# Altium PCB main.PcbDoc (part 8 of 16)
Units mil, origin at the board's own origin, x right, y up, seen from the top; angles counter-clockwise.
Board outline 8394.75 x 5164.44 mil, 7 copper layers (Top Layer 1, Layer 2, Layer 3, Unused, Layer 4_pow, Layer 5_gnd, Bottom 6+gnd), stack 64.043 mil thick; 364 components, 409 nets, 1932 pads, 1061 vias.
Unrouted connection lines stored in the file: 2.
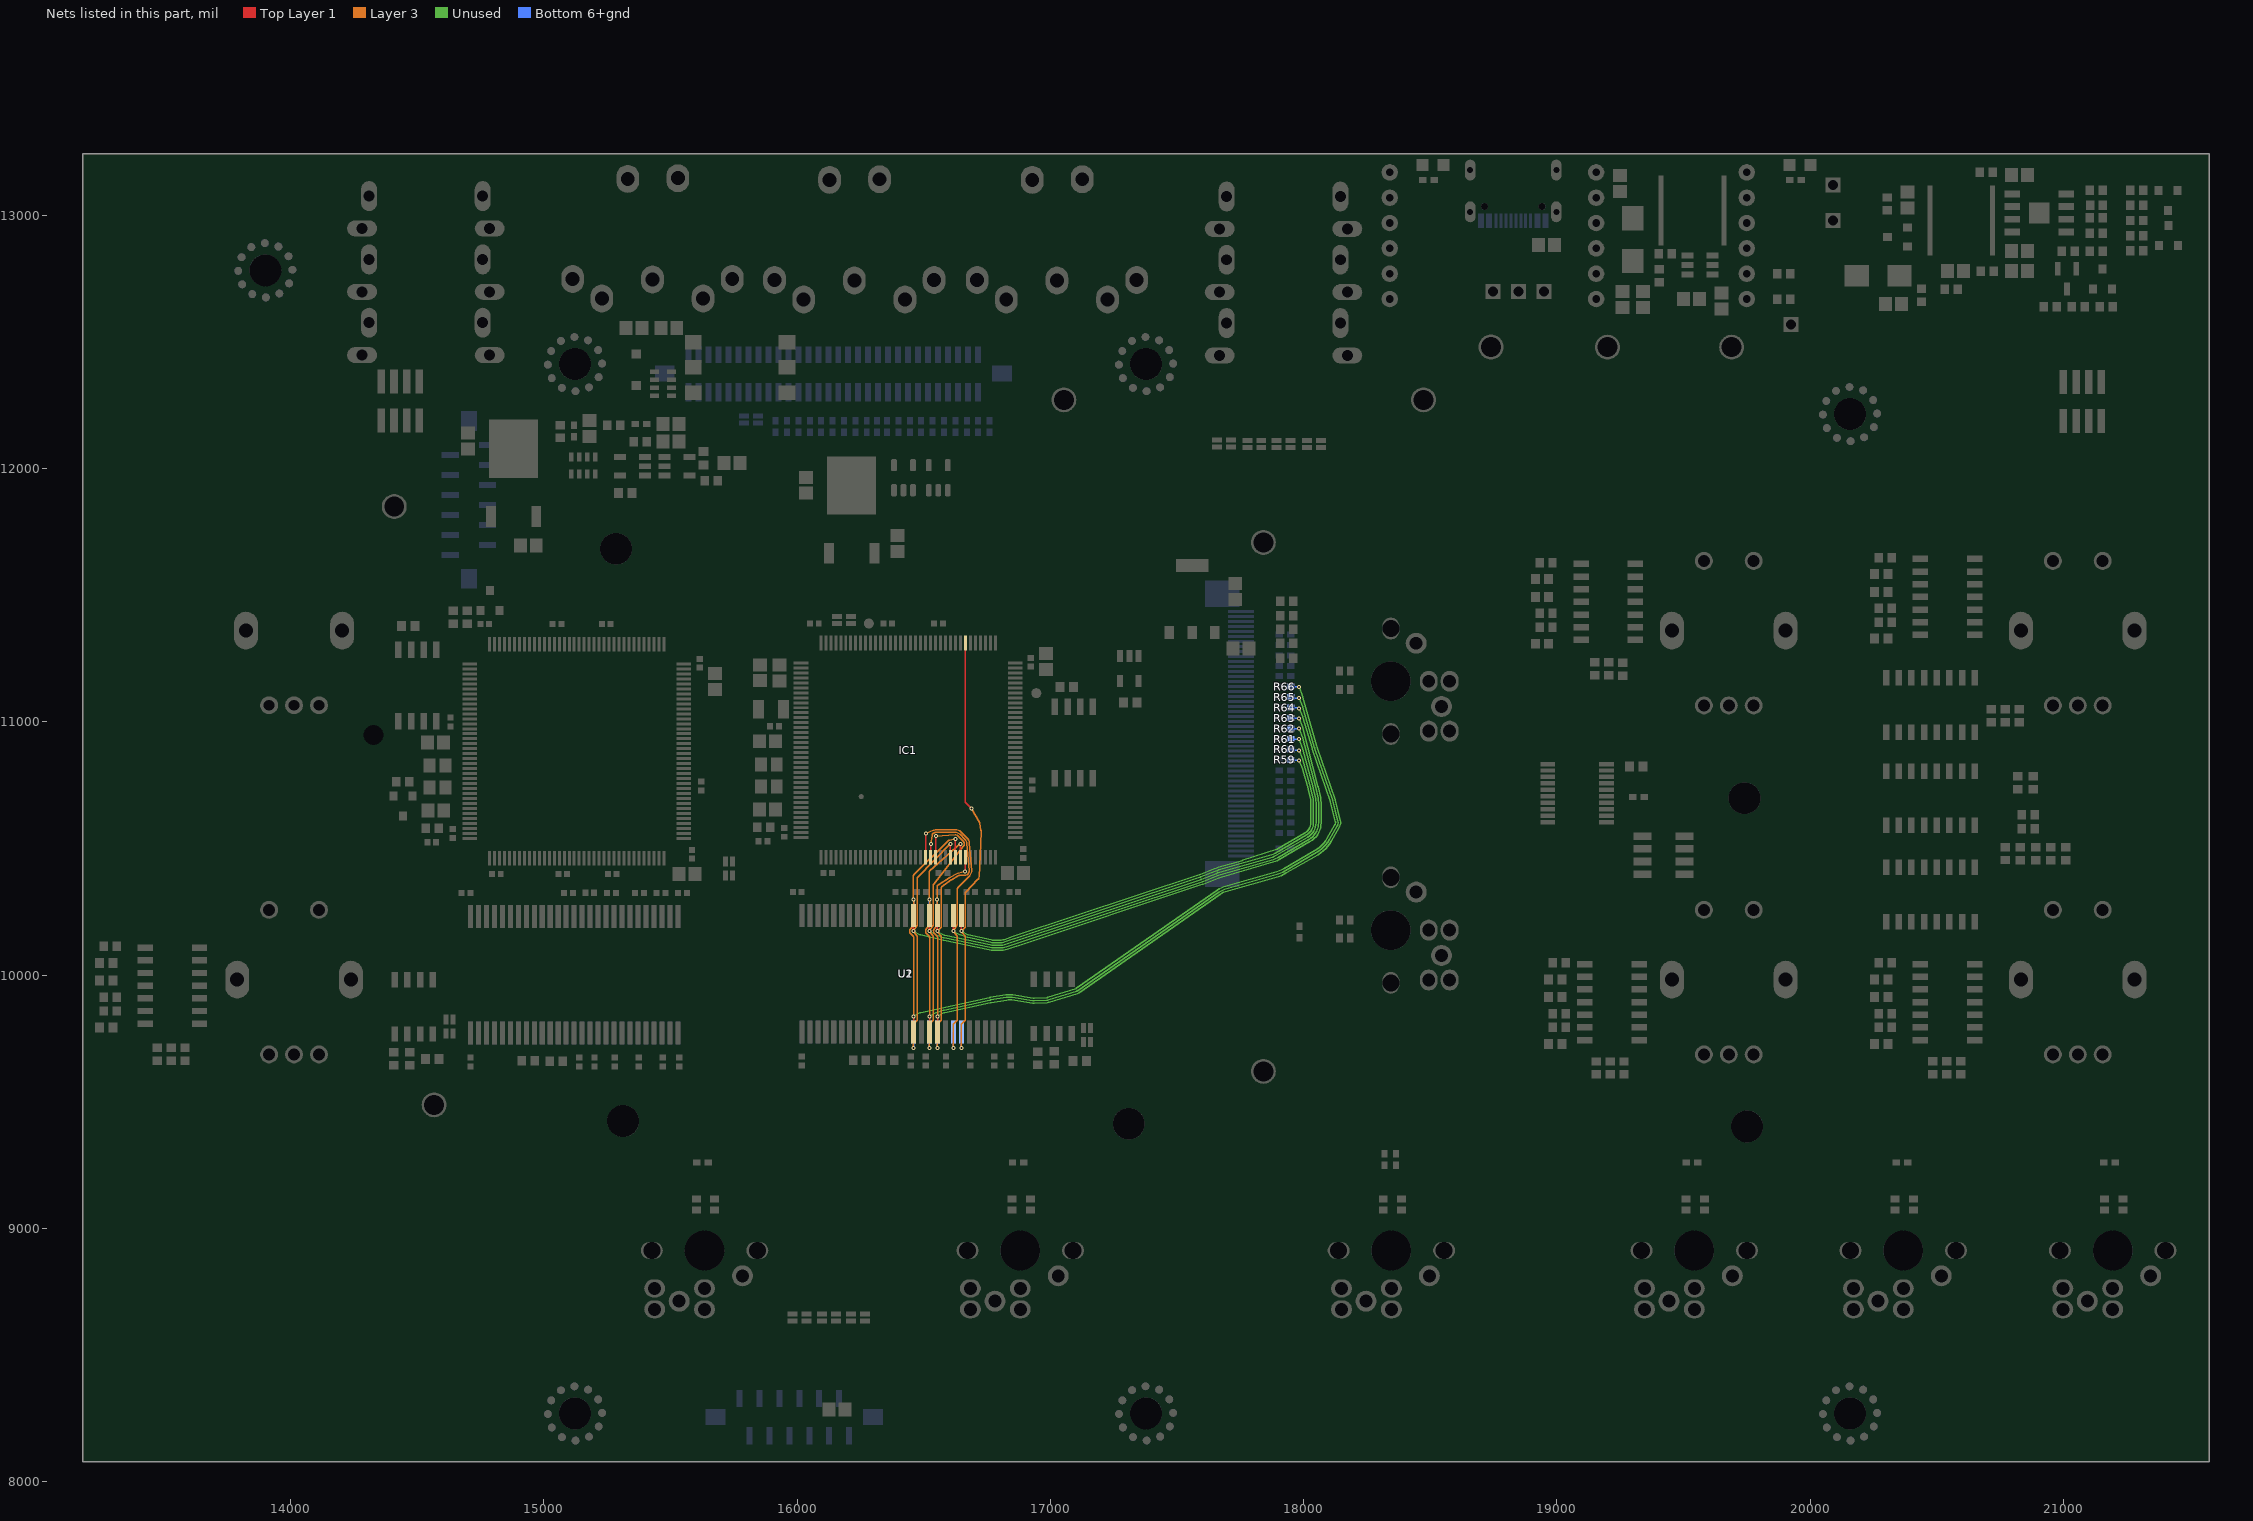
[diagram p11: the nets of this part, all layers, seen from the top]

## Via types
v1: diameter 15.75, hole 7.87, Top Layer 1 to Bottom 6+gnd, tented both sides, 961 vias
v2: diameter 27.56, hole 11.81, Top Layer 1 to Bottom 6+gnd, 45 vias
v3: diameter 23.62/23.62/23.62/23.62/23.62/23.62/23.62 (per signal layer), hole 12, Top Layer 1 to Bottom 6+gnd, tented top, 42 vias
v4: diameter 15.75, hole 7.87, Top Layer 1 to Bottom 6+gnd, 10 vias
v5: diameter 23.62/23.62/23.62/23.62/23.62/23.62/23.62 (per signal layer), hole 12, Top Layer 1 to Bottom 6+gnd, tented bottom, 3 vias

## Nets (pads, with @x,y where several pads share a name; then routed paths per layer and width w, separated by ;. In a path a pad name is that pad's centre, name@x,y a point inside that pad or via, vN(x,y) a via of type N, cw(c..) or ccw(c..) an arc to the next point about the centre after c; other vN are vias at no path point) (continued)
D3: IC1.115 R59.2 U1.7 U2.7 | length 3727
  Top Layer 1 w5: v1@16648.03,10176.1 16648.03,10193.72 U1.7@16648.38,10235.48 ; IC1.115@16664.69,11311.42 16664.69,10682.28 v1(16688.15,10658.82)
  Unused w5: v1(16648.38,10174.13) 16650.45,10172.06 ccw(c16653.95,10175.62) 16651.7,10171.16 16672.93,10160.42 ccw(c16679.87,10174.13) 16676.53,10159.13 16766.88,10139.56 ccw(c16774.36,10174.13) 16774.36,10138.76 16805.86,10138.76 ccw(c16805.86,10174.13) 16817.6,10140.76 16853.01,10153.09 cw(c16871.26,10100.81) 16853.84,10153.37 17587.34,10396.45 ccw(c17573.21,10439.17) 17589.84,10397.36 17647.76,10420.22 cw(c17710.04,10262.58) 17663.01,10425.42 17757.39,10452.73 ccw(c17749.02,10481.54) 17758.42,10453.05 17893.39,10497.7 ccw(c17882.4,10530.93) 17895.15,10498.34 17897.32,10499.19 ccw(c17895.5,10503.84) 17898,10499.51 18006.44,10562.8 ccw(c17983.57,10601.98) 18028.94,10601.98 18028.94,10681.98 ccw(c17983.57,10681.98) 18027.81,10692.07 18018.07,10734.8 ccw(c17983.57,10726.98) 18017.71,10736.25 17997.3,10811.48 ccw(c17982.46,10807.45) 17996.65,10813.36 v1(17982.46,10847.45)
  Layer 3 w5: v1(16648.38,9713.5) 16648.38,9805.11 cw(c16653.38,9805.11) 16649.83,9808.64 16663.04,9821.89 ; 16664,10324.67 16664,10191.78 cw(c16659,10191.87) 16662.54,10188.34 v1(16648.38,10174.13) v1@16648.38,10172.06 ; 16664,10324.68 cw(c16669,10324.68) 16665.42,10328.16 16714.15,10378.08 ccw(c16703.15,10388.82) 16718.5,10387.97 16725.59,10516.36 ; v1(16688.15,10658.82) 16721.2,10602.23 cw(c16716.88,10599.71) 16721.82,10600.5 ; 16721.82,10600.47 16726.09,10572.64 cw(c16710.89,10570.31) 16726.26,10570.13 ; 16726.26,10570.12 16725.61,10517.01 ; v1@16648.38,10172.06 ccw(c16653.38,10172.07) v1@16649.62,10168.77 ; v1@16648.38,10172.06 ccw(c16653.38,10172.07) v1@16649.62,10168.77 ; v1@16648.38,10172.06 ccw(c16653.38,10172.07) v1@16649.62,10168.77 ; v1@16648.38,10172.06 ccw(c16653.38,10172.07) v1@16649.62,10168.77 ; v1@16648.38,10172.06 ccw(c16653.38,10172.07) v1@16649.62,10168.77 ; v1@16648.38,10172.06 ccw(c16653.38,10172.07) v1@16649.62,10168.77 ; v1@16648.38,10172.06 ccw(c16653.38,10172.07) v1@16649.62,10168.77 ; v1@16648.38,10172.06 ccw(c16653.38,10172.07) v1@16649.62,10168.77 ; v1@16648.38,10172.06 ccw(c16653.38,10172.07) v1@16649.62,10168.77 ; v1@16648.38,10172.06 ccw(c16653.38,10172.07) v1@16649.62,10168.77 ; v1@16648.38,10172.06 ccw(c16653.38,10172.07) v1@16649.62,10168.77 ; v1@16648.38,10172.06 ccw(c16653.38,10172.07) v1@16649.62,10168.77 ; v1@16648.38,10172.06 ccw(c16653.38,10172.07) v1@16649.62,10168.77 ; v1@16648.38,10172.06 ccw(c16653.38,10172.07) v1@16649.62,10168.77 ; v1@16648.38,10172.06 ccw(c16653.38,10172.07) v1@16649.62,10168.77 ; v1@16648.38,10172.06 ccw(c16653.38,10172.07) v1@16649.62,10168.77 ; v1@16649.62,10168.77 16663.26,10153.23 ; 16663.04,9821.89 ccw(c16659.5,9825.42) 16664.5,9825.33 ; 16663.04,9821.89 ccw(c16659.5,9825.42) 16664.5,9825.33 ; 16663.04,9821.89 ccw(c16659.5,9825.42) 16664.5,9825.33 ; 16663.04,9821.89 ccw(c16659.5,9825.42) 16664.5,9825.33 ; 16663.04,9821.89 ccw(c16659.5,9825.42) 16664.5,9825.33 ; 16663.04,9821.89 ccw(c16659.5,9825.42) 16664.5,9825.33 ; 16663.04,9821.89 ccw(c16659.5,9825.42) 16664.5,9825.33 ; 16663.04,9821.89 ccw(c16659.5,9825.42) 16664.5,9825.33 ; 16663.04,9821.89 ccw(c16659.5,9825.42) 16664.5,9825.33 ; 16663.04,9821.89 ccw(c16659.5,9825.42) 16664.5,9825.33 ; 16663.04,9821.89 ccw(c16659.5,9825.42) 16664.5,9825.33 ; 16663.04,9821.89 ccw(c16659.5,9825.42) 16664.5,9825.33 ; 16663.04,9821.89 ccw(c16659.5,9825.42) 16664.5,9825.33 ; 16663.04,9821.89 ccw(c16659.5,9825.42) 16664.5,9825.33 ; 16663.04,9821.89 ccw(c16659.5,9825.42) 16664.5,9825.33 ; 16663.04,9821.89 ccw(c16659.5,9825.42) 16664.5,9825.33 ; 16663.26,10153.23 cw(c16659.5,10149.93) 16664.5,10150.02 ; 16663.26,10153.23 cw(c16659.5,10149.93) 16664.5,10150.02 ; 16663.26,10153.23 cw(c16659.5,10149.93) 16664.5,10150.02 ; 16663.26,10153.23 cw(c16659.5,10149.93) 16664.5,10150.02 ; 16663.26,10153.23 cw(c16659.5,10149.93) 16664.5,10150.02 ; 16663.26,10153.23 cw(c16659.5,10149.93) 16664.5,10150.02 ; 16663.26,10153.23 cw(c16659.5,10149.93) 16664.5,10150.02 ; 16663.26,10153.23 cw(c16659.5,10149.93) 16664.5,10150.02 ; 16663.26,10153.23 cw(c16659.5,10149.93) 16664.5,10150.02 ; 16663.26,10153.23 cw(c16659.5,10149.93) 16664.5,10150.02 ; 16663.26,10153.23 cw(c16659.5,10149.93) 16664.5,10150.02 ; 16663.26,10153.23 cw(c16659.5,10149.93) 16664.5,10150.02 ; 16663.26,10153.23 cw(c16659.5,10149.93) 16664.5,10150.02 ; 16663.26,10153.23 cw(c16659.5,10149.93) 16664.5,10150.02 ; 16663.26,10153.23 cw(c16659.5,10149.93) 16664.5,10150.02 ; 16663.26,10153.23 cw(c16659.5,10149.93) 16664.5,10150.02 ; 16664.5,9825.33 16664.5,10150.02 ; 16725.59,10516.36 ccw(c16710.24,10517.2) 16725.61,10517.01 ; 16725.59,10516.36 ccw(c16710.24,10517.2) 16725.61,10517.01 ; 16725.59,10516.36 ccw(c16710.24,10517.2) 16725.61,10517.01 ; 16725.59,10516.36 ccw(c16710.24,10517.2) 16725.61,10517.01 ; 16725.59,10516.36 ccw(c16710.24,10517.2) 16725.61,10517.01 ; 16725.59,10516.36 ccw(c16710.24,10517.2) 16725.61,10517.01 ; 16725.59,10516.36 ccw(c16710.24,10517.2) 16725.61,10517.01 ; 16725.59,10516.36 ccw(c16710.24,10517.2) 16725.61,10517.01 ; 16725.59,10516.36 ccw(c16710.24,10517.2) 16725.61,10517.01 ; 16725.59,10516.36 ccw(c16710.24,10517.2) 16725.61,10517.01 ; 16725.59,10516.36 ccw(c16710.24,10517.2) 16725.61,10517.01 ; 16725.59,10516.36 ccw(c16710.24,10517.2) 16725.61,10517.01 ; 16725.59,10516.36 ccw(c16710.24,10517.2) 16725.61,10517.01 ; 16725.59,10516.36 ccw(c16710.24,10517.2) 16725.61,10517.01 ; 16725.59,10516.36 ccw(c16710.24,10517.2) 16725.61,10517.01 ; 16725.59,10516.36 ccw(c16710.24,10517.2) 16725.61,10517.01
  Bottom 6+gnd w5: v1@16648.62,9713.75 U2.7@16648.62,9775.59 ; R59.2@17947.32,10848.97 17948.43,10848.97 17980.94,10848.97 v1(17982.46,10847.45)
D4: IC1.58 R60.2 U1.8 U2.8 | length 4529.1
  Top Layer 1 w5: IC1.58@16507.21,10465.91 16507.6,10466.3 16507.6,10558.27 v1(16509.02,10559.69) ; v1@16616.54,10177.2 16616.54,10193.72 U1.8@16616.88,10235.48
  Unused w5: v1(17982.46,10887.45) 17996.65,10853.36 cw(c17982.46,10847.45) 17997.31,10851.42 18027.41,10738.69 cw(c17983.57,10726.98) 18027.82,10737 18037.56,10694.29 cw(c17983.57,10681.98) 18038.94,10681.98 18038.94,10601.98 cw(c17983.57,10601.98) 18011.48,10554.16 17887.12,10481.59 cw(c17859.4,10529.09) 17874.35,10476.16 17665.74,10415.8 ccw(c17710.04,10262.58) 17651.45,10410.93 17593.5,10388.05 cw(c17573.21,10439.17) 17590.48,10386.96 16857.02,10143.89 ccw(c16871.26,10100.81) 16856.28,10143.64 16820.87,10131.31 cw(c16805.86,10174.13) 16805.86,10128.76 16774.36,10128.76 cw(c16774.36,10174.13) 16764.76,10129.79 16674.41,10149.35 cw(c16679.87,10174.13) 16671.89,10150.05 16643.49,10159.55 cw(c16648.38,10174.13) 16641.26,10160.51 16619.43,10171.91 cw(c16621.74,10176.34) 16618.25,10172.76 v1(16616.88,10174.13) ; v1(16616.88,10174.13) ccw(c16611.9,10174.58) 16616.54,10176.44 16616.54,10177.2 ccw(c16621.54,10177.23) 16616.71,10175.96 16616.74,10175.85 cw(c16611.9,10174.58) 16616.89,10174.28 v1(16616.88,10174.13)
  Layer 3 w5: v1(16509.02,10559.69) 16538.18,10572.15 ; v1(16616.88,9713.5) 16616.88,9805.11 cw(c16621.88,9805.12) 16618.33,9808.63 16631.54,9821.89 ; 16679.86,10521.47 16688.8,10412.59 ; 16538.18,10572.15 cw(c16548.15,10548.82) 16548.23,10574.19 ; 16538.18,10572.15 cw(c16548.15,10548.82) 16548.23,10574.19 ; 16538.18,10572.15 cw(c16548.15,10548.82) 16548.23,10574.19 ; 16538.18,10572.15 cw(c16548.15,10548.82) 16548.23,10574.19 ; 16538.18,10572.15 cw(c16548.15,10548.82) 16548.23,10574.19 ; 16538.18,10572.15 cw(c16548.15,10548.82) 16548.23,10574.19 ; 16538.18,10572.15 cw(c16548.15,10548.82) 16548.23,10574.19 ; 16538.18,10572.15 cw(c16548.15,10548.82) 16548.23,10574.19 ; 16548.23,10574.19 16625.32,10573.96 ; 16625.32,10573.96 cw(c16625.24,10538.58) 16650.66,10563.18 ; 16625.32,10573.96 cw(c16625.24,10538.58) 16650.66,10563.18 ; 16625.32,10573.96 cw(c16625.24,10538.58) 16650.66,10563.18 ; 16625.32,10573.96 cw(c16625.24,10538.58) 16650.66,10563.18 ; 16625.32,10573.96 cw(c16625.24,10538.58) 16650.66,10563.18 ; 16625.32,10573.96 cw(c16625.24,10538.58) 16650.66,10563.18 ; 16625.32,10573.96 cw(c16625.24,10538.58) 16650.66,10563.18 ; 16625.32,10573.96 cw(c16625.24,10538.58) 16650.66,10563.18 ; 16625.32,10573.96 cw(c16625.24,10538.58) 16650.66,10563.18 ; 16625.32,10573.96 cw(c16625.24,10538.58) 16650.66,10563.18 ; 16625.32,10573.96 cw(c16625.24,10538.58) 16650.66,10563.18 ; 16625.32,10573.96 cw(c16625.24,10538.58) 16650.66,10563.18 ; 16625.32,10573.96 cw(c16625.24,10538.58) 16650.66,10563.18 ; 16625.32,10573.96 cw(c16625.24,10538.58) 16650.66,10563.18 ; 16625.32,10573.96 cw(c16625.24,10538.58) 16650.66,10563.18 ; 16625.32,10573.96 cw(c16625.24,10538.58) 16650.66,10563.18 ; 16631.54,9821.89 ccw(c16628,9825.42) 16633,9825.33 ; 16631.54,9821.89 ccw(c16628,9825.42) 16633,9825.33 ; 16631.54,9821.89 ccw(c16628,9825.42) 16633,9825.33 ; 16631.54,9821.89 ccw(c16628,9825.42) 16633,9825.33 ; 16631.54,9821.89 ccw(c16628,9825.42) 16633,9825.33 ; 16631.54,9821.89 ccw(c16628,9825.42) 16633,9825.33 ; 16631.54,9821.89 ccw(c16628,9825.42) 16633,9825.33 ; 16631.54,9821.89 ccw(c16628,9825.42) 16633,9825.33 ; 16631.54,9821.89 ccw(c16628,9825.42) 16633,9825.33 ; 16631.54,9821.89 ccw(c16628,9825.42) 16633,9825.33 ; 16631.54,9821.89 ccw(c16628,9825.42) 16633,9825.33 ; 16631.54,9821.89 ccw(c16628,9825.42) 16633,9825.33 ; 16631.54,9821.89 ccw(c16628,9825.42) 16633,9825.33 ; 16631.54,9821.89 ccw(c16628,9825.42) 16633,9825.33 ; 16631.54,9821.89 ccw(c16628,9825.42) 16633,9825.33 ; 16631.54,9821.89 ccw(c16628,9825.42) 16633,9825.33 ; 16631.95,10152.99 cw(c16628,10149.93) 16633,10150.02 ; 16631.95,10152.99 cw(c16628,10149.93) 16633,10150.02 ; 16631.95,10152.99 cw(c16628,10149.93) 16633,10150.02 ; 16631.95,10152.99 cw(c16628,10149.93) 16633,10150.02 ; 16631.95,10152.99 cw(c16628,10149.93) 16633,10150.02 ; 16631.95,10152.99 cw(c16628,10149.93) 16633,10150.02 ; 16631.95,10152.99 cw(c16628,10149.93) 16633,10150.02 ; 16631.95,10152.99 cw(c16628,10149.93) 16633,10150.02 ; 16631.95,10152.99 cw(c16628,10149.93) 16633,10150.02 ; 16631.95,10152.99 cw(c16628,10149.93) 16633,10150.02 ; 16631.95,10152.99 cw(c16628,10149.93) 16633,10150.02 ; 16631.95,10152.99 cw(c16628,10149.93) 16633,10150.02 ; 16631.95,10152.99 cw(c16628,10149.93) 16633,10150.02 ; 16631.95,10152.99 cw(c16628,10149.93) 16633,10150.02 ; 16631.95,10152.99 cw(c16628,10149.93) 16633,10150.02 ; 16631.95,10152.99 cw(c16628,10149.93) 16633,10150.02 ; 16631.95,10152.99 16617.94,10171.06 cw(c16621.88,10174.13) v1(16616.88,10174.13) 16616.88,10174.19 cw(c16621.88,10174.13) 16617.68,10176.85 16632.45,10199.68 ; 16632.45,10199.68 ccw(c16628.25,10202.4) 16633.25,10202.31 ; 16632.45,10199.68 ccw(c16628.25,10202.4) 16633.25,10202.31 ; 16632.45,10199.68 ccw(c16628.25,10202.4) 16633.25,10202.31 ; 16632.45,10199.68 ccw(c16628.25,10202.4) 16633.25,10202.31 ; 16632.45,10199.68 ccw(c16628.25,10202.4) 16633.25,10202.31 ; 16632.45,10199.68 ccw(c16628.25,10202.4) 16633.25,10202.31 ; 16632.45,10199.68 ccw(c16628.25,10202.4) 16633.25,10202.31 ; 16632.45,10199.68 ccw(c16628.25,10202.4) 16633.25,10202.31 ; 16632.45,10199.68 ccw(c16628.25,10202.4) 16633.25,10202.31 ; 16632.45,10199.68 ccw(c16628.25,10202.4) 16633.25,10202.31 ; 16632.45,10199.68 ccw(c16628.25,10202.4) 16633.25,10202.31 ; 16632.45,10199.68 ccw(c16628.25,10202.4) 16633.25,10202.31 ; 16632.45,10199.68 ccw(c16628.25,10202.4) 16633.25,10202.31 ; 16632.45,10199.68 ccw(c16628.25,10202.4) 16633.25,10202.31 ; 16632.45,10199.68 ccw(c16628.25,10202.4) 16633.25,10202.31 ; 16632.45,10199.68 ccw(c16628.25,10202.4) 16633.25,10202.31 ; 16633,9825.33 16633,10150.02 ; 16633.25,10202.31 16633.25,10341.5 ; 16633.25,10341.5 cw(c16638.25,10341.5) 16634.7,10345.01 ; 16633.25,10341.5 cw(c16638.25,10341.5) 16634.7,10345.01 ; 16633.25,10341.5 cw(c16638.25,10341.5) 16634.7,10345.01 ; 16633.25,10341.5 cw(c16638.25,10341.5) 16634.7,10345.01 ; 16633.25,10341.5 cw(c16638.25,10341.5) 16634.7,10345.01 ; 16633.25,10341.5 cw(c16638.25,10341.5) 16634.7,10345.01 ; 16633.25,10341.5 cw(c16638.25,10341.5) 16634.7,10345.01 ; 16633.25,10341.5 cw(c16638.25,10341.5) 16634.7,10345.01 ; 16633.25,10341.5 cw(c16638.25,10341.5) 16634.7,10345.01 ; 16633.25,10341.5 cw(c16638.25,10341.5) 16634.7,10345.01 ; 16633.25,10341.5 cw(c16638.25,10341.5) 16634.7,10345.01 ; 16633.25,10341.5 cw(c16638.25,10341.5) 16634.7,10345.01 ; 16633.25,10341.5 cw(c16638.25,10341.5) 16634.7,10345.01 ; 16633.25,10341.5 cw(c16638.25,10341.5) 16634.7,10345.01 ; 16633.25,10341.5 cw(c16638.25,10341.5) 16634.7,10345.01 ; 16633.25,10341.5 cw(c16638.25,10341.5) 16634.7,10345.01 ; 16634.7,10345.01 16636.28,10346.59 ; 16636.28,10346.59 ccw(c16618.3,10364.5) 16636.41,10346.72 ; 16636.28,10346.59 ccw(c16618.3,10364.5) 16636.41,10346.72 ; 16636.28,10346.59 ccw(c16618.3,10364.5) 16636.41,10346.72 ; 16636.28,10346.59 ccw(c16618.3,10364.5) 16636.41,10346.72 ; 16636.28,10346.59 ccw(c16618.3,10364.5) 16636.41,10346.72 ; 16636.28,10346.59 ccw(c16618.3,10364.5) 16636.41,10346.72 ; 16636.28,10346.59 ccw(c16618.3,10364.5) 16636.41,10346.72 ; 16636.28,10346.59 ccw(c16618.3,10364.5) 16636.41,10346.72 ; 16636.28,10346.59 ccw(c16618.3,10364.5) 16636.41,10346.72 ; 16636.28,10346.59 ccw(c16618.3,10364.5) 16636.41,10346.72 ; 16636.28,10346.59 ccw(c16618.3,10364.5) 16636.41,10346.72 ; 16636.28,10346.59 ccw(c16618.3,10364.5) 16636.41,10346.72 ; 16636.28,10346.59 ccw(c16618.3,10364.5) 16636.41,10346.72 ; 16636.28,10346.59 ccw(c16618.3,10364.5) 16636.41,10346.72 ; 16636.28,10346.59 ccw(c16618.3,10364.5) 16636.41,10346.72 ; 16636.28,10346.59 ccw(c16618.3,10364.5) 16636.41,10346.72 ; 16636.41,10346.72 16681.61,10392.74 ; 16650.66,10563.18 16669.98,10543.23 ; 16669.98,10543.23 cw(c16644.61,10518.58) 16679.86,10521.48 ; 16669.98,10543.23 cw(c16644.61,10518.58) 16679.86,10521.48 ; 16669.98,10543.23 cw(c16644.61,10518.58) 16679.86,10521.48 ; 16669.98,10543.23 cw(c16644.61,10518.58) 16679.86,10521.48 ; 16669.98,10543.23 cw(c16644.61,10518.58) 16679.86,10521.48 ; 16669.98,10543.23 cw(c16644.61,10518.58) 16679.86,10521.48 ; 16669.98,10543.23 cw(c16644.61,10518.58) 16679.86,10521.48 ; 16669.98,10543.23 cw(c16644.61,10518.58) 16679.86,10521.48 ; 16669.98,10543.23 cw(c16644.61,10518.58) 16679.86,10521.48 ; 16669.98,10543.23 cw(c16644.61,10518.58) 16679.86,10521.48 ; 16669.98,10543.23 cw(c16644.61,10518.58) 16679.86,10521.48 ; 16669.98,10543.23 cw(c16644.61,10518.58) 16679.86,10521.48 ; 16669.98,10543.23 cw(c16644.61,10518.58) 16679.86,10521.48 ; 16669.98,10543.23 cw(c16644.61,10518.58) 16679.86,10521.48 ; 16669.98,10543.23 cw(c16644.61,10518.58) 16679.86,10521.48 ; 16669.98,10543.23 cw(c16644.61,10518.58) 16679.86,10521.48 ; 16681.61,10392.74 ccw(c16663.51,10410.52) 16688.8,10412.59 ; 16681.61,10392.74 ccw(c16663.51,10410.52) 16688.8,10412.59 ; 16681.61,10392.74 ccw(c16663.51,10410.52) 16688.8,10412.59 ; 16681.61,10392.74 ccw(c16663.51,10410.52) 16688.8,10412.59 ; 16681.61,10392.74 ccw(c16663.51,10410.52) 16688.8,10412.59 ; 16681.61,10392.74 ccw(c16663.51,10410.52) 16688.8,10412.59 ; 16681.61,10392.74 ccw(c16663.51,10410.52) 16688.8,10412.59 ; 16681.61,10392.74 ccw(c16663.51,10410.52) 16688.8,10412.59 ; 16681.61,10392.74 ccw(c16663.51,10410.52) 16688.8,10412.59 ; 16681.61,10392.74 ccw(c16663.51,10410.52) 16688.8,10412.59 ; 16681.61,10392.74 ccw(c16663.51,10410.52) 16688.8,10412.59 ; 16681.61,10392.74 ccw(c16663.51,10410.52) 16688.8,10412.59 ; 16681.61,10392.74 ccw(c16663.51,10410.52) 16688.8,10412.59 ; 16681.61,10392.74 ccw(c16663.51,10410.52) 16688.8,10412.59 ; 16681.61,10392.74 ccw(c16663.51,10410.52) 16688.8,10412.59 ; 16681.61,10392.74 ccw(c16663.51,10410.52) 16688.8,10412.59
  Bottom 6+gnd w5: v1@16617.13,9713.75 U2.8@16617.13,9775.59 ; R60.2@17947.32,10890.29 17948.15,10890.11 17960.69,10887.45 v1(17982.46,10887.45)
D5: IC1.59 R61.2 U1.10 U2.10 | length 4236.6
  Top Layer 1 w5: IC1.59@16526.73,10466.06 16527.3,10466.63 16527.3,10518.01 v1(16527.87,10518.58) ; v1(16553.89,10174.13) 16553.89,10193.72 U1.10@16554.13,10236.22
  Unused w5: v1(16553.89,10174.13) 16555.43,10172.64 ccw(c16558.89,10176.25) 16556.29,10171.98 16577.74,10158.97 ccw(c16585.65,10172.15) 16582.55,10157.09 16763.14,10119.91 ccw(c16774.36,10174.13) 16774.36,10118.76 16805.86,10118.76 ccw(c16805.86,10174.13) 16824.13,10121.86 16859.61,10134.21 cw(c16871.26,10100.81) 16860.13,10134.39 17593.62,10377.46 ccw(c17573.21,10439.17) 17597.15,10378.74 17655.15,10401.64 cw(c17710.04,10262.58) 17668.53,10406.2 17877.13,10466.55 ccw(c17859.4,10529.09) 17892.16,10472.95 18016.52,10545.52 ccw(c17983.57,10601.98) 18048.94,10601.98 18048.94,10681.98 ccw(c17983.57,10681.98) 18047.31,10696.49 18037.57,10739.21 ccw(c17983.57,10726.98) 18037.1,10741.16 17997.32,10891.39 ccw(c17982.46,10887.45) 17996.91,10892.71 v1(17982.46,10932.45)
  Layer 3 w5: v1(16527.87,10518.58) 16532.96,10551.19 cw(c16548.15,10548.82) 16548.2,10564.19 16625.31,10563.96 ; v1(16553.89,9713.5) 16553.89,9805.11 cw(c16558.89,9805.12) 16555.33,9808.63 16568.55,9821.89 ; v1@16553.89,10172.06 ccw(c16558.89,10172.07) v1@16555.13,10168.77 ; v1@16553.89,10172.06 ccw(c16558.89,10172.07) v1@16555.13,10168.77 ; v1@16553.89,10172.06 ccw(c16558.89,10172.07) v1@16555.13,10168.77 ; v1@16553.89,10172.06 ccw(c16558.89,10172.07) v1@16555.13,10168.77 ; v1@16553.89,10172.06 ccw(c16558.89,10172.07) v1@16555.13,10168.77 ; v1@16553.89,10172.06 ccw(c16558.89,10172.07) v1@16555.13,10168.77 ; v1@16553.89,10172.06 ccw(c16558.89,10172.07) v1@16555.13,10168.77 ; v1@16553.89,10172.06 ccw(c16558.89,10172.07) v1@16555.13,10168.77 ; v1@16553.89,10172.06 ccw(c16558.89,10172.07) v1@16555.13,10168.77 ; v1@16553.89,10172.06 ccw(c16558.89,10172.07) v1@16555.13,10168.77 ; v1@16553.89,10172.06 ccw(c16558.89,10172.07) v1@16555.13,10168.77 ; v1@16553.89,10172.06 ccw(c16558.89,10172.07) v1@16555.13,10168.77 ; v1@16553.89,10172.06 ccw(c16558.89,10172.07) v1@16555.13,10168.77 ; v1@16553.89,10172.06 ccw(c16558.89,10172.07) v1@16555.13,10168.77 ; v1@16553.89,10172.06 ccw(c16558.89,10172.07) v1@16555.13,10168.77 ; v1@16553.89,10172.06 ccw(c16558.89,10172.07) v1@16555.13,10168.77 ; v1@16553.89,10172.06 v1(16553.89,10174.13) 16568.14,10188.43 ccw(c16564.6,10191.96) 16569.6,10191.87 16569.6,10344.72 cw(c16574.6,10344.72) 16571.6,10348.72 16609.09,10376.81 ; v1@16555.13,10168.77 16568.77,10153.23 ; 16568.55,9821.89 ccw(c16565.01,9825.42) 16570.01,9825.33 ; 16568.55,9821.89 ccw(c16565.01,9825.42) 16570.01,9825.33 ; 16568.55,9821.89 ccw(c16565.01,9825.42) 16570.01,9825.33 ; 16568.55,9821.89 ccw(c16565.01,9825.42) 16570.01,9825.33 ; 16568.55,9821.89 ccw(c16565.01,9825.42) 16570.01,9825.33 ; 16568.55,9821.89 ccw(c16565.01,9825.42) 16570.01,9825.33 ; 16568.55,9821.89 ccw(c16565.01,9825.42) 16570.01,9825.33 ; 16568.55,9821.89 ccw(c16565.01,9825.42) 16570.01,9825.33 ; 16568.55,9821.89 ccw(c16565.01,9825.42) 16570.01,9825.33 ; 16568.55,9821.89 ccw(c16565.01,9825.42) 16570.01,9825.33 ; 16568.55,9821.89 ccw(c16565.01,9825.42) 16570.01,9825.33 ; 16568.55,9821.89 ccw(c16565.01,9825.42) 16570.01,9825.33 ; 16568.55,9821.89 ccw(c16565.01,9825.42) 16570.01,9825.33 ; 16568.55,9821.89 ccw(c16565.01,9825.42) 16570.01,9825.33 ; 16568.55,9821.89 ccw(c16565.01,9825.42) 16570.01,9825.33 ; 16568.55,9821.89 ccw(c16565.01,9825.42) 16570.01,9825.33 ; 16568.77,10153.23 cw(c16565.01,10149.93) 16570.01,10150.02 ; 16568.77,10153.23 cw(c16565.01,10149.93) 16570.01,10150.02 ; 16568.77,10153.23 cw(c16565.01,10149.93) 16570.01,10150.02 ; 16568.77,10153.23 cw(c16565.01,10149.93) 16570.01,10150.02 ; 16568.77,10153.23 cw(c16565.01,10149.93) 16570.01,10150.02 ; 16568.77,10153.23 cw(c16565.01,10149.93) 16570.01,10150.02 ; 16568.77,10153.23 cw(c16565.01,10149.93) 16570.01,10150.02 ; 16568.77,10153.23 cw(c16565.01,10149.93) 16570.01,10150.02 ; 16568.77,10153.23 cw(c16565.01,10149.93) 16570.01,10150.02 ; 16568.77,10153.23 cw(c16565.01,10149.93) 16570.01,10150.02 ; 16568.77,10153.23 cw(c16565.01,10149.93) 16570.01,10150.02 ; 16568.77,10153.23 cw(c16565.01,10149.93) 16570.01,10150.02 ; 16568.77,10153.23 cw(c16565.01,10149.93) 16570.01,10150.02 ; 16568.77,10153.23 cw(c16565.01,10149.93) 16570.01,10150.02 ; 16568.77,10153.23 cw(c16565.01,10149.93) 16570.01,10150.02 ; 16568.77,10153.23 cw(c16565.01,10149.93) 16570.01,10150.02 ; 16570.01,9825.33 16570.01,10150.02 ; 16609.09,10376.81 cw(c16618.3,10364.5) 16610.63,10377.83 ; 16609.09,10376.81 cw(c16618.3,10364.5) 16610.63,10377.83 ; 16609.09,10376.81 cw(c16618.3,10364.5) 16610.63,10377.83 ; 16609.09,10376.81 cw(c16618.3,10364.5) 16610.63,10377.83 ; 16609.09,10376.81 cw(c16618.3,10364.5) 16610.63,10377.83 ; 16609.09,10376.81 cw(c16618.3,10364.5) 16610.63,10377.83 ; 16609.09,10376.81 cw(c16618.3,10364.5) 16610.63,10377.83 ; 16609.09,10376.81 cw(c16618.3,10364.5) 16610.63,10377.83 ; 16609.09,10376.81 cw(c16618.3,10364.5) 16610.63,10377.83 ; 16609.09,10376.81 cw(c16618.3,10364.5) 16610.63,10377.83 ; 16609.09,10376.81 cw(c16618.3,10364.5) 16610.63,10377.83 ; 16609.09,10376.81 cw(c16618.3,10364.5) 16610.63,10377.83 ; 16609.09,10376.81 cw(c16618.3,10364.5) 16610.63,10377.83 ; 16609.09,10376.81 cw(c16618.3,10364.5) 16610.63,10377.83 ; 16609.09,10376.81 cw(c16618.3,10364.5) 16610.63,10377.83 ; 16609.09,10376.81 cw(c16618.3,10364.5) 16610.63,10377.83 ; 16610.63,10377.83 16635.48,10392.14 ; 16625.31,10563.96 cw(c16625.24,10538.58) 16643.47,10556.23 ; 16625.31,10563.96 cw(c16625.24,10538.58) 16643.47,10556.23 ; 16625.31,10563.96 cw(c16625.24,10538.58) 16643.47,10556.23 ; 16625.31,10563.96 cw(c16625.24,10538.58) 16643.47,10556.23 ; 16625.31,10563.96 cw(c16625.24,10538.58) 16643.47,10556.23 ; 16625.31,10563.96 cw(c16625.24,10538.58) 16643.47,10556.23 ; 16625.31,10563.96 cw(c16625.24,10538.58) 16643.47,10556.23 ; 16625.31,10563.96 cw(c16625.24,10538.58) 16643.47,10556.23 ; 16625.31,10563.96 cw(c16625.24,10538.58) 16643.47,10556.23 ; 16625.31,10563.96 cw(c16625.24,10538.58) 16643.47,10556.23 ; 16625.31,10563.96 cw(c16625.24,10538.58) 16643.47,10556.23 ; 16625.31,10563.96 cw(c16625.24,10538.58) 16643.47,10556.23 ; 16625.31,10563.96 cw(c16625.24,10538.58) 16643.47,10556.23 ; 16625.31,10563.96 cw(c16625.24,10538.58) 16643.47,10556.23 ; 16625.31,10563.96 cw(c16625.24,10538.58) 16643.47,10556.23 ; 16625.31,10563.96 cw(c16625.24,10538.58) 16643.47,10556.23 ; 16635.48,10392.14 cw(c16643.15,10378.82) 16642.45,10394.18 ; 16635.48,10392.14 cw(c16643.15,10378.82) 16642.45,10394.18 ; 16635.48,10392.14 cw(c16643.15,10378.82) 16642.45,10394.18 ; 16635.48,10392.14 cw(c16643.15,10378.82) 16642.45,10394.18 ; 16635.48,10392.14 cw(c16643.15,10378.82) 16642.45,10394.18 ; 16635.48,10392.14 cw(c16643.15,10378.82) 16642.45,10394.18 ; 16635.48,10392.14 cw(c16643.15,10378.82) 16642.45,10394.18 ; 16635.48,10392.14 cw(c16643.15,10378.82) 16642.45,10394.18 ; 16635.48,10392.14 cw(c16643.15,10378.82) 16642.45,10394.18 ; 16635.48,10392.14 cw(c16643.15,10378.82) 16642.45,10394.18 ; 16635.48,10392.14 cw(c16643.15,10378.82) 16642.45,10394.18 ; 16635.48,10392.14 cw(c16643.15,10378.82) 16642.45,10394.18 ; 16635.48,10392.14 cw(c16643.15,10378.82) 16642.45,10394.18 ; 16635.48,10392.14 cw(c16643.15,10378.82) 16642.45,10394.18 ; 16635.48,10392.14 cw(c16643.15,10378.82) 16642.45,10394.18 ; 16635.48,10392.14 cw(c16643.15,10378.82) 16642.45,10394.18 ; 16642.45,10394.18 16664.2,10395.16 ; 16643.47,10556.23 16662.83,10536.23 cw(c16644.61,10518.58) 16669.9,10520.66 16678.83,10411.78 ; 16664.2,10395.16 ccw(c16663.51,10410.52) 16678.83,10411.78 ; 16664.2,10395.16 ccw(c16663.51,10410.52) 16678.83,10411.78 ; 16664.2,10395.16 ccw(c16663.51,10410.52) 16678.83,10411.78 ; 16664.2,10395.16 ccw(c16663.51,10410.52) 16678.83,10411.78 ; 16664.2,10395.16 ccw(c16663.51,10410.52) 16678.83,10411.78 ; 16664.2,10395.16 ccw(c16663.51,10410.52) 16678.83,10411.78 ; 16664.2,10395.16 ccw(c16663.51,10410.52) 16678.83,10411.78 ; 16664.2,10395.16 ccw(c16663.51,10410.52) 16678.83,10411.78 ; 16664.2,10395.16 ccw(c16663.51,10410.52) 16678.83,10411.78 ; 16664.2,10395.16 ccw(c16663.51,10410.52) 16678.83,10411.78 ; 16664.2,10395.16 ccw(c16663.51,10410.52) 16678.83,10411.78 ; 16664.2,10395.16 ccw(c16663.51,10410.52) 16678.83,10411.78 ; 16664.2,10395.16 ccw(c16663.51,10410.52) 16678.83,10411.78 ; 16664.2,10395.16 ccw(c16663.51,10410.52) 16678.83,10411.78 ; 16664.2,10395.16 ccw(c16663.51,10410.52) 16678.83,10411.78 ; 16664.2,10395.16 ccw(c16663.51,10410.52) 16678.83,10411.78
  Bottom 6+gnd w5: v1@16554.13,9713.75 U2.10@16554.13,9775.59 ; R61.2@17947.32,10931.6 17981.61,10931.6 v1(17982.46,10932.45)
D6: IC1.60 R62.2 U1.11 U2.11 | length 3636.5
  Top Layer 1 w5: v1(16522.39,10174.13) 16522.39,10193.72 U1.11@16522.64,10236.22 ; IC1.60@16546.58,10465.91 16547.28,10466.61 16547.28,10547.95 v1(16548.15,10548.82)
  Unused w5: v1(16522.39,10174.13) 16523.98,10172.62 ccw(c16527.39,10176.28) 16525.08,10171.85 16546.76,10160.51 ccw(c16553.89,10174.13) 16548.12,10159.88 16576.19,10148.61 ccw(c16585.65,10172.15) 16580.53,10147.3 16761.18,10110.1 ccw(c16774.36,10174.13) 16774.36,10108.76 16805.86,10108.76 ccw(c16805.86,10174.13) 16827.38,10112.4 16862.9,10124.76 cw(c16871.26,10100.81) 16863.28,10124.89 17596.76,10367.97 ccw(c17573.21,10439.17) 17600.79,10369.43 17658.78,10392.32 cw(c17710.04,10262.58) 17671.27,10396.58 17879.86,10456.93 ccw(c17859.4,10529.09) 17897.19,10464.3 18021.56,10536.89 ccw(c17983.57,10601.98) 18058.94,10601.98 18058.94,10681.98 ccw(c17983.57,10681.98) 18057.05,10698.76 18047.32,10741.43 ccw(c17983.57,10726.98) 18046.89,10743.24 17997.35,10936.27 ccw(c17982.46,10932.45) 17996.74,10938.14 v1(17982.46,10974.03)
  Layer 3 w5: v1(16522.39,9713.5) 16522.39,9805.11 cw(c16527.39,9805.12) 16523.84,9808.63 16537.06,9821.89 ; v1(16548.15,10548.82) 16624.21,10553.92 ; 16537.06,9821.89 ccw(c16533.51,9825.42) 16538.51,9825.33 ; 16537.06,9821.89 ccw(c16533.51,9825.42) 16538.51,9825.33 ; 16537.06,9821.89 ccw(c16533.51,9825.42) 16538.51,9825.33 ; 16537.06,9821.89 ccw(c16533.51,9825.42) 16538.51,9825.33 ; 16537.06,9821.89 ccw(c16533.51,9825.42) 16538.51,9825.33 ; 16537.06,9821.89 ccw(c16533.51,9825.42) 16538.51,9825.33 ; 16537.06,9821.89 ccw(c16533.51,9825.42) 16538.51,9825.33 ; 16537.06,9821.89 ccw(c16533.51,9825.42) 16538.51,9825.33 ; 16537.06,9821.89 ccw(c16533.51,9825.42) 16538.51,9825.33 ; 16537.06,9821.89 ccw(c16533.51,9825.42) 16538.51,9825.33 ; 16537.06,9821.89 ccw(c16533.51,9825.42) 16538.51,9825.33 ; 16537.06,9821.89 ccw(c16533.51,9825.42) 16538.51,9825.33 ; 16537.06,9821.89 ccw(c16533.51,9825.42) 16538.51,9825.33 ; 16537.06,9821.89 ccw(c16533.51,9825.42) 16538.51,9825.33 ; 16537.06,9821.89 ccw(c16533.51,9825.42) 16538.51,9825.33 ; 16537.06,9821.89 ccw(c16533.51,9825.42) 16538.51,9825.33 ; 16537.46,10152.99 cw(c16533.51,10149.93) 16538.51,10150.02 ; 16537.46,10152.99 cw(c16533.51,10149.93) 16538.51,10150.02 ; 16537.46,10152.99 cw(c16533.51,10149.93) 16538.51,10150.02 ; 16537.46,10152.99 cw(c16533.51,10149.93) 16538.51,10150.02 ; 16537.46,10152.99 cw(c16533.51,10149.93) 16538.51,10150.02 ; 16537.46,10152.99 cw(c16533.51,10149.93) 16538.51,10150.02 ; 16537.46,10152.99 cw(c16533.51,10149.93) 16538.51,10150.02 ; 16537.46,10152.99 cw(c16533.51,10149.93) 16538.51,10150.02 ; 16537.46,10152.99 cw(c16533.51,10149.93) 16538.51,10150.02 ; 16537.46,10152.99 cw(c16533.51,10149.93) 16538.51,10150.02 ; 16537.46,10152.99 cw(c16533.51,10149.93) 16538.51,10150.02 ; 16537.46,10152.99 cw(c16533.51,10149.93) 16538.51,10150.02 ; 16537.46,10152.99 cw(c16533.51,10149.93) 16538.51,10150.02 ; 16537.46,10152.99 cw(c16533.51,10149.93) 16538.51,10150.02 ; 16537.46,10152.99 cw(c16533.51,10149.93) 16538.51,10150.02 ; 16537.46,10152.99 cw(c16533.51,10149.93) 16538.51,10150.02 ; 16537.47,10152.99 16523.44,10171.06 cw(c16527.39,10174.13) v1(16522.39,10174.13) 16522.39,10174.19 cw(c16527.39,10174.13) 16523.21,10176.88 16536.95,10197.79 ccw(c16532.77,10200.53) 16537.77,10200.44 16537.77,10356.36 ; 16537.77,10356.36 cw(c16542.77,10356.36) 16538.84,10359.46 ; 16537.77,10356.36 cw(c16542.77,10356.36) 16538.84,10359.46 ; 16537.77,10356.36 cw(c16542.77,10356.36) 16538.84,10359.46 ; 16537.77,10356.36 cw(c16542.77,10356.36) 16538.84,10359.46 ; 16537.77,10356.36 cw(c16542.77,10356.36) 16538.84,10359.46 ; 16537.77,10356.36 cw(c16542.77,10356.36) 16538.84,10359.46 ; 16537.77,10356.36 cw(c16542.77,10356.36) 16538.84,10359.46 ; 16537.77,10356.36 cw(c16542.77,10356.36) 16538.84,10359.46 ; 16537.77,10356.36 cw(c16542.77,10356.36) 16538.84,10359.46 ; 16537.77,10356.36 cw(c16542.77,10356.36) 16538.84,10359.46 ; 16537.77,10356.36 cw(c16542.77,10356.36) 16538.84,10359.46 ; 16537.77,10356.36 cw(c16542.77,10356.36) 16538.84,10359.46 ; 16537.77,10356.36 cw(c16542.77,10356.36) 16538.84,10359.46 ; 16537.77,10356.36 cw(c16542.77,10356.36) 16538.84,10359.46 ; 16537.77,10356.36 cw(c16542.77,10356.36) 16538.84,10359.46 ; 16537.77,10356.36 cw(c16542.77,10356.36) 16538.84,10359.46 ; 16538.51,9825.33 16538.51,10150.02 ; 16538.84,10359.46 16656.68,10509.07 ccw(c16644.61,10518.58) 16655.65,10529.28 16636.28,10549.28 ; 16624.21,10553.92 cw(c16625.24,10538.58) 16636.28,10549.28 ; 16624.21,10553.92 cw(c16625.24,10538.58) 16636.28,10549.28 ; 16624.21,10553.92 cw(c16625.24,10538.58) 16636.28,10549.28 ; 16624.21,10553.92 cw(c16625.24,10538.58) 16636.28,10549.28 ; 16624.21,10553.92 cw(c16625.24,10538.58) 16636.28,10549.28 ; 16624.21,10553.92 cw(c16625.24,10538.58) 16636.28,10549.28 ; 16624.21,10553.92 cw(c16625.24,10538.58) 16636.28,10549.28 ; 16624.21,10553.92 cw(c16625.24,10538.58) 16636.28,10549.28 ; 16624.21,10553.92 cw(c16625.24,10538.58) 16636.28,10549.28 ; 16624.21,10553.92 cw(c16625.24,10538.58) 16636.28,10549.28 ; 16624.21,10553.92 cw(c16625.24,10538.58) 16636.28,10549.28 ; 16624.21,10553.92 cw(c16625.24,10538.58) 16636.28,10549.28 ; 16624.21,10553.92 cw(c16625.24,10538.58) 16636.28,10549.28 ; 16624.21,10553.92 cw(c16625.24,10538.58) 16636.28,10549.28 ; 16624.21,10553.92 cw(c16625.24,10538.58) 16636.28,10549.28 ; 16624.21,10553.92 cw(c16625.24,10538.58) 16636.28,10549.28
  Bottom 6+gnd w5: v1@16522.64,9713.75 U2.11@16522.64,9775.59 ; R62.2@17948.43,10974.03 v1(17982.46,10974.03)
D7: IC1.63 R63.2 U1.13 U2.13 | length 3429.1
  Top Layer 1 w5: v1(16459.4,10174.13) 16459.4,10193.72 U1.13@16459.65,10236.22 ; IC1.63@16605.47,10466.06 v1@16605.47,10518.35
  Unused w5: v1(16459.4,10174.13) 16460.89,10172.65 ccw(c16464.4,10176.21) 16462.09,10171.77 16483.85,10160.47 ccw(c16490.9,10174.13) 16487.34,10159.18 16577.53,10137.72 16578.47,10137.51 ccw(c16580.53,10147.3) 16578.56,10137.5 16759.18,10100.3 ccw(c16774.36,10174.13) 16774.36,10098.76 16805.86,10098.76 ccw(c16805.86,10174.13) 16830.63,10102.95 16866.18,10115.32 cw(c16871.26,10100.81) 16866.43,10115.4 17599.95,10358.49 ccw(c17573.21,10439.17) 17604.41,10360.11 17662.5,10383.04 cw(c17710.04,10262.58) 17674.07,10386.98 17882.68,10447.34 ccw(c17859.4,10529.09) 17902.23,10455.67 18026.6,10528.25 ccw(c17983.57,10601.98) 18068.94,10601.98 18068.94,10681.98 ccw(c17983.57,10681.98) 18066.8,10700.98 18057.07,10743.66 ccw(c17983.57,10726.98) 18056.56,10745.76 17997.36,10977.83 ccw(c17982.46,10974.03) 17996.65,10979.94 v1(17982.46,11014.03)
  Layer 3 w5: v1(16459.4,9713.5) 16459.4,9805.11 cw(c16464.4,9805.12) 16460.85,9808.63 16473.81,9821.64 ; v1(16605.24,10518.58) 16476.2,10386.87 ; v1(16459.4,10174.13) ccw(c16464.4,10174.13) v1@16460.43,10171.1 ; v1(16459.4,10174.13) ccw(c16464.4,10174.13) v1@16460.43,10171.1 ; v1(16459.4,10174.13) ccw(c16464.4,10174.13) v1@16460.43,10171.1 ; v1(16459.4,10174.13) ccw(c16464.4,10174.13) v1@16460.43,10171.1 ; v1(16459.4,10174.13) ccw(c16464.4,10174.13) v1@16460.43,10171.09 ; v1(16459.4,10174.13) 16459.4,10174.19 cw(c16464.4,10174.13) 16460.22,10176.88 16473.95,10197.79 ccw(c16469.77,10200.53) 16474.77,10200.44 16474.77,10383.37 ; v1@16460.43,10171.09 16474.22,10153.24 ; 16473.81,9821.64 ccw(c16470.26,9825.17) 16475.26,9825.08 ; 16473.81,9821.64 ccw(c16470.26,9825.17) 16475.26,9825.08 ; 16473.81,9821.64 ccw(c16470.26,9825.17) 16475.26,9825.08 ; 16473.81,9821.64 ccw(c16470.26,9825.17) 16475.26,9825.08 ; 16473.81,9821.64 ccw(c16470.26,9825.17) 16475.26,9825.08 ; 16473.81,9821.64 ccw(c16470.26,9825.17) 16475.26,9825.08 ; 16473.81,9821.64 ccw(c16470.26,9825.17) 16475.26,9825.08 ; 16473.81,9821.64 ccw(c16470.26,9825.17) 16475.26,9825.08 ; 16473.81,9821.64 ccw(c16470.26,9825.17) 16475.26,9825.08 ; 16473.81,9821.64 ccw(c16470.26,9825.17) 16475.26,9825.08 ; 16473.81,9821.64 ccw(c16470.26,9825.17) 16475.26,9825.08 ; 16473.81,9821.64 ccw(c16470.26,9825.17) 16475.26,9825.08 ; 16473.81,9821.64 ccw(c16470.26,9825.17) 16475.26,9825.08 ; 16473.81,9821.64 ccw(c16470.26,9825.17) 16475.26,9825.08 ; 16473.81,9821.64 ccw(c16470.26,9825.17) 16475.26,9825.08 ; 16473.81,9821.64 ccw(c16470.26,9825.17) 16475.26,9825.08 ; 16474.22,10153.24 cw(c16470.26,10150.19) 16475.26,10150.28 ; 16474.22,10153.24 cw(c16470.26,10150.19) 16475.26,10150.28 ; 16474.22,10153.24 cw(c16470.26,10150.19) 16475.26,10150.28 ; 16474.22,10153.24 cw(c16470.26,10150.19) 16475.26,10150.28 ; 16474.22,10153.24 cw(c16470.26,10150.19) 16475.26,10150.28 ; 16474.22,10153.24 cw(c16470.26,10150.19) 16475.26,10150.28 ; 16474.22,10153.24 cw(c16470.26,10150.19) 16475.26,10150.28 ; 16474.22,10153.24 cw(c16470.26,10150.19) 16475.26,10150.28 ; 16474.22,10153.24 cw(c16470.26,10150.19) 16475.26,10150.28 ; 16474.22,10153.24 cw(c16470.26,10150.19) 16475.26,10150.28 ; 16474.22,10153.24 cw(c16470.26,10150.19) 16475.26,10150.28 ; 16474.22,10153.24 cw(c16470.26,10150.19) 16475.26,10150.28 ; 16474.22,10153.24 cw(c16470.26,10150.19) 16475.26,10150.28 ; 16474.22,10153.24 cw(c16470.26,10150.19) 16475.26,10150.28 ; 16474.22,10153.24 cw(c16470.26,10150.19) 16475.26,10150.28 ; 16474.22,10153.24 cw(c16470.26,10150.19) 16475.26,10150.28 ; 16474.77,10383.37 cw(c16479.77,10383.37) 16476.2,10386.87 ; 16474.77,10383.37 cw(c16479.77,10383.37) 16476.19,10386.86 ; 16474.77,10383.37 cw(c16479.77,10383.37) 16476.19,10386.86 ; 16474.77,10383.37 cw(c16479.77,10383.37) 16476.19,10386.86 ; 16474.77,10383.37 cw(c16479.77,10383.37) 16476.19,10386.86 ; 16474.77,10383.37 cw(c16479.77,10383.37) 16476.19,10386.86 ; 16474.77,10383.37 cw(c16479.77,10383.37) 16476.19,10386.86 ; 16474.77,10383.37 cw(c16479.77,10383.37) 16476.19,10386.86 ; 16474.77,10383.37 cw(c16479.77,10383.37) 16476.19,10386.85 ; 16474.77,10383.37 cw(c16479.77,10383.37) 16476.19,10386.85 ; 16474.77,10383.37 cw(c16479.77,10383.37) 16476.19,10386.85 ; 16474.77,10383.37 cw(c16479.77,10383.37) 16476.19,10386.85 ; 16474.77,10383.37 cw(c16479.77,10383.37) 16476.19,10386.85 ; 16474.77,10383.37 cw(c16479.77,10383.37) 16476.19,10386.85 ; 16474.77,10383.37 cw(c16479.77,10383.37) 16476.19,10386.85 ; 16474.77,10383.37 cw(c16479.77,10383.37) 16476.19,10386.85 ; 16475.26,9825.08 16475.26,10150.28
  Bottom 6+gnd w5: v1@16459.65,9713.75 U2.13@16459.65,9775.59 ; R63.2@17947.32,11014.23 17982.25,11014.23 v1(17982.46,11014.03)
D8: IC1.64 R64.2 U1.42 U2.42 | length 3696.2
  Top Layer 1 w5: U1.42@16459.65,9775.59 16459.89,9818.09 v1(16459.89,9837.68) ; IC1.64@16625.32,10465.9 v1@16625.32,10538.5
  Unused w5: v1(16459.89,9837.68) 16461.37,9839.15 cw(c16464.89,9835.6) 16462.59,9840.04 16484.28,9851.31 cw(c16491.39,9837.68) 16488.13,9852.7 16758.92,9911.35 cw(c16774.85,9837.68) 16762.89,9912.09 16824.29,9921.97 cw(c16837.84,9837.68) 16851.02,9922.03 16932.76,9909.48 ccw(c16935.11,9924.67) 16935.89,9909.31 16986.05,9911.85 ccw(c16985.24,9927.2) 16989.79,9912.52 17100.25,9946.79 ccw(c17098.03,9953.96) 17102.32,9947.81 17658.84,10335.99 cw(c17710.04,10262.58) 17685.17,10348.55 17893.88,10408.94 ccw(c17859.4,10529.09) 17922.28,10421.05 18046.76,10493.7 ccw(c17983.57,10601.98) 18092.29,10539.56 18123.88,10594.57 ccw(c18110.55,10602.23) 18125.49,10605.83 18115.75,10646.2 ccw(c18100.81,10642.59) 18115.68,10646.47 18105.48,10685.68 ccw(c18090.6,10681.8) 18105.07,10686.99 18034.88,10891.96 cw(c18141.73,10928.53) 18033.48,10896.35 17997.19,11018.41 ccw(c17982.46,11014.03) 17996.65,11019.94 v1(17982.46,11054.03)
  Layer 3 w5: v1(16459.89,9837.68) 16459.89,10149.87 ; v1(16625.24,10538.58) 16602.02,10533.62 ; 16458.43,10153.31 cw(c16454.89,10149.78) 16459.89,10149.87 ; 16458.43,10153.31 cw(c16454.89,10149.78) 16459.89,10149.87 ; 16458.43,10153.31 cw(c16454.89,10149.78) 16459.89,10149.87 ; 16458.43,10153.31 cw(c16454.89,10149.78) 16459.89,10149.87 ; 16458.43,10153.31 cw(c16454.89,10149.78) 16459.89,10149.87 ; 16458.43,10153.31 cw(c16454.89,10149.78) 16459.89,10149.87 ; 16458.43,10153.31 cw(c16454.89,10149.78) 16459.89,10149.87 ; 16458.43,10153.31 cw(c16454.89,10149.78) 16459.89,10149.87 ; 16458.43,10153.31 cw(c16454.89,10149.78) 16459.89,10149.87 ; 16458.43,10153.31 cw(c16454.89,10149.78) 16459.89,10149.87 ; 16458.43,10153.31 cw(c16454.89,10149.78) 16459.89,10149.87 ; 16458.43,10153.31 cw(c16454.89,10149.78) 16459.89,10149.87 ; 16458.43,10153.31 cw(c16454.89,10149.78) 16459.89,10149.87 ; 16458.43,10153.31 cw(c16454.89,10149.78) 16459.89,10149.87 ; 16458.43,10153.31 cw(c16454.89,10149.78) 16459.89,10149.87 ; 16458.43,10153.31 cw(c16454.89,10149.78) 16459.89,10149.87 ; 16458.43,10153.31 16448.51,10163.28 cw(c16459.4,10174.13) 16447.88,10184.31 16458.64,10196.48 ; 16458.64,10196.48 ccw(c16454.89,10199.79) 16459.89,10199.7 ; 16458.64,10196.48 ccw(c16454.89,10199.79) 16459.89,10199.7 ; 16458.64,10196.48 ccw(c16454.89,10199.79) 16459.89,10199.7 ; 16458.64,10196.48 ccw(c16454.89,10199.79) 16459.89,10199.7 ; 16458.64,10196.48 ccw(c16454.89,10199.79) 16459.89,10199.7 ; 16458.64,10196.48 ccw(c16454.89,10199.79) 16459.89,10199.7 ; 16458.64,10196.48 ccw(c16454.89,10199.79) 16459.89,10199.7 ; 16458.64,10196.48 ccw(c16454.89,10199.79) 16459.89,10199.7 ; 16458.64,10196.48 ccw(c16454.89,10199.79) 16459.89,10199.7 ; 16458.64,10196.48 ccw(c16454.89,10199.79) 16459.89,10199.7 ; 16458.64,10196.48 ccw(c16454.89,10199.79) 16459.89,10199.7 ; 16458.64,10196.48 ccw(c16454.89,10199.79) 16459.89,10199.7 ; 16458.64,10196.48 ccw(c16454.89,10199.79) 16459.89,10199.7 ; 16458.64,10196.48 ccw(c16454.89,10199.79) 16459.89,10199.7 ; 16458.64,10196.48 ccw(c16454.89,10199.79) 16459.89,10199.7 ; 16458.64,10196.48 ccw(c16454.89,10199.79) 16459.89,10199.7 ; 16459.4,10392.42 cw(c16464.4,10392.42) 16460.85,10395.93 ; 16459.4,10392.42 cw(c16464.4,10392.42) 16460.85,10395.93 ; 16459.4,10392.42 cw(c16464.4,10392.42) 16460.85,10395.93 ; 16459.4,10392.42 cw(c16464.4,10392.42) 16460.85,10395.93 ; 16459.4,10392.42 cw(c16464.4,10392.42) 16460.85,10395.93 ; 16459.4,10392.42 cw(c16464.4,10392.42) 16460.85,10395.93 ; 16459.4,10392.42 cw(c16464.4,10392.42) 16460.85,10395.93 ; 16459.4,10392.42 cw(c16464.4,10392.42) 16460.85,10395.93 ; 16459.4,10392.42 cw(c16464.4,10392.42) 16460.85,10395.93 ; 16459.4,10392.42 cw(c16464.4,10392.42) 16460.85,10395.93 ; 16459.4,10392.42 cw(c16464.4,10392.42) 16460.85,10395.93 ; 16459.4,10392.42 cw(c16464.4,10392.42) 16460.85,10395.93 ; 16459.4,10392.42 cw(c16464.4,10392.42) 16460.85,10395.93 ; 16459.4,10392.42 cw(c16464.4,10392.42) 16460.85,10395.93 ; 16459.4,10392.42 cw(c16464.4,10392.42) 16460.85,10395.93 ; 16459.4,10392.42 cw(c16464.4,10392.42) 16460.85,10395.93 ; 16459.4,10392.42 v1(16459.4,10298.31) 16459.89,10297.82 16459.89,10199.7 ; 16460.85,10395.93 16594.38,10529.47 ; 16594.38,10529.47 cw(c16605.24,10518.58) 16602.02,10533.62 ; 16594.38,10529.47 cw(c16605.24,10518.58) 16602.02,10533.62 ; 16594.38,10529.47 cw(c16605.24,10518.58) 16602.02,10533.62 ; 16594.38,10529.47 cw(c16605.24,10518.58) 16602.02,10533.62 ; 16594.38,10529.47 cw(c16605.24,10518.58) 16602.02,10533.62 ; 16594.38,10529.47 cw(c16605.24,10518.58) 16602.02,10533.62 ; 16594.38,10529.47 cw(c16605.24,10518.58) 16602.02,10533.62 ; 16594.38,10529.47 cw(c16605.24,10518.58) 16602.02,10533.62 ; 16594.38,10529.47 cw(c16605.24,10518.58) 16602.02,10533.62 ; 16594.38,10529.47 cw(c16605.24,10518.58) 16602.02,10533.62 ; 16594.38,10529.47 cw(c16605.24,10518.58) 16602.02,10533.62 ; 16594.38,10529.47 cw(c16605.24,10518.58) 16602.02,10533.62 ; 16594.38,10529.47 cw(c16605.24,10518.58) 16602.02,10533.62 ; 16594.38,10529.47 cw(c16605.24,10518.58) 16602.02,10533.62 ; 16594.38,10529.47 cw(c16605.24,10518.58) 16602.02,10533.62 ; 16594.38,10529.47 cw(c16605.24,10518.58) 16602.02,10533.62
  Bottom 6+gnd w5: U2.42@16459.65,10236.22 v1@16459.65,10298.06 ; R64.2@17947.32,11055.55 17980.94,11055.55 v1(17982.46,11054.03)
D9: IC1.65 R65.2 U1.44 U2.44 | length 3497.6
  Top Layer 1 w5: U1.44@16522.64,9775.59 16522.88,9818.09 v1(16522.88,9837.68) ; IC1.65@16644.84,10466.06 v1@16644.84,10518.35
  Unused w5: v1(16522.88,9837.68) 16524.36,9839.15 cw(c16527.88,9835.6) 16525.58,9840.04 16547.27,9851.31 cw(c16554.38,9837.68) 16549.5,9852.25 16577.84,9861.75 cw(c16585.87,9837.68) 16580.55,9862.48 16761.07,9901.58 cw(c16774.85,9837.68) 16764.46,9902.22 16825.85,9912.09 cw(c16837.84,9837.68) 16849.47,9912.15 16931.17,9899.6 ccw(c16935.11,9924.67) 16936.43,9899.33 16986.51,9901.86 ccw(c16985.24,9927.2) 16992.72,9902.96 17103.22,9937.24 ccw(c17098.03,9953.96) 17108.04,9939.6 17664.48,10327.73 cw(c17710.04,10262.58) 17688,10338.96 17896.69,10399.34 ccw(c17859.4,10529.09) 17927.32,10412.42 18051.8,10485.06 ccw(c17983.57,10601.98) 18100.97,10534.58 18132.55,10589.59 ccw(c18110.55,10602.23) 18135.22,10608.18 18125.47,10648.55 ccw(c18100.81,10642.59) 18125.36,10648.99 18115.15,10688.19 ccw(c18090.6,10681.8) 18114.53,10690.23 18044.35,10895.19 cw(c18141.73,10928.53) 18042.82,10900.04 17997.23,11058.29 ccw(c17982.46,11054.03) 17996.65,11059.94 v1(17982.46,11094.03)
  Layer 3 w5: v1(16522.88,9837.68) 16522.88,10149.87 ; v1(16644.61,10518.58) 16524.08,10412.23 ; 16521.43,10153.31 cw(c16517.88,10149.78) 16522.88,10149.87 ; 16521.43,10153.31 cw(c16517.88,10149.78) 16522.88,10149.87 ; 16521.43,10153.31 cw(c16517.88,10149.78) 16522.88,10149.87 ; 16521.43,10153.31 cw(c16517.88,10149.78) 16522.88,10149.87 ; 16521.43,10153.31 cw(c16517.88,10149.78) 16522.88,10149.87 ; 16521.43,10153.31 cw(c16517.88,10149.78) 16522.88,10149.87 ; 16521.43,10153.31 cw(c16517.88,10149.78) 16522.88,10149.87 ; 16521.43,10153.31 cw(c16517.88,10149.78) 16522.88,10149.87 ; 16521.43,10153.31 cw(c16517.88,10149.78) 16522.88,10149.87 ; 16521.43,10153.31 cw(c16517.88,10149.78) 16522.88,10149.87 ; 16521.43,10153.31 cw(c16517.88,10149.78) 16522.88,10149.87 ; 16521.43,10153.31 cw(c16517.88,10149.78) 16522.88,10149.87 ; 16521.43,10153.31 cw(c16517.88,10149.78) 16522.88,10149.87 ; 16521.43,10153.31 cw(c16517.88,10149.78) 16522.88,10149.87 ; 16521.43,10153.31 cw(c16517.88,10149.78) 16522.88,10149.87 ; 16521.43,10153.31 cw(c16517.88,10149.78) 16522.88,10149.87 ; 16521.43,10153.31 16511.5,10163.28 cw(c16522.39,10174.13) 16510.87,10184.31 16521.63,10196.48 ; 16521.63,10196.48 ccw(c16517.88,10199.79) 16522.88,10199.7 ; 16521.63,10196.48 ccw(c16517.88,10199.79) 16522.88,10199.7 ; 16521.63,10196.48 ccw(c16517.88,10199.79) 16522.88,10199.7 ; 16521.63,10196.48 ccw(c16517.88,10199.79) 16522.88,10199.7 ; 16521.63,10196.48 ccw(c16517.88,10199.79) 16522.88,10199.7 ; 16521.63,10196.48 ccw(c16517.88,10199.79) 16522.88,10199.7 ; 16521.63,10196.48 ccw(c16517.88,10199.79) 16522.88,10199.7 ; 16521.63,10196.48 ccw(c16517.88,10199.79) 16522.88,10199.7 ; 16521.63,10196.48 ccw(c16517.88,10199.79) 16522.88,10199.7 ; 16521.63,10196.48 ccw(c16517.88,10199.79) 16522.88,10199.7 ; 16521.63,10196.48 ccw(c16517.88,10199.79) 16522.88,10199.7 ; 16521.63,10196.48 ccw(c16517.88,10199.79) 16522.88,10199.7 ; 16521.63,10196.48 ccw(c16517.88,10199.79) 16522.88,10199.7 ; 16521.63,10196.48 ccw(c16517.88,10199.79) 16522.88,10199.7 ; 16521.63,10196.48 ccw(c16517.88,10199.79) 16522.88,10199.7 ; 16521.63,10196.48 ccw(c16517.88,10199.79) 16522.88,10199.7 ; 16522.39,10408.49 cw(c16527.39,10408.49) 16524.08,10412.24 ; 16522.39,10408.49 cw(c16527.39,10408.49) 16524.08,10412.24 ; 16522.39,10408.49 cw(c16527.39,10408.49) 16524.08,10412.24 ; 16522.39,10408.49 cw(c16527.39,10408.49) 16524.08,10412.24 ; 16522.39,10408.49 cw(c16527.39,10408.49) 16524.08,10412.24 ; 16522.39,10408.49 cw(c16527.39,10408.49) 16524.08,10412.24 ; 16522.39,10408.49 cw(c16527.39,10408.49) 16524.08,10412.24 ; 16522.39,10408.49 cw(c16527.39,10408.49) 16524.08,10412.24 ; 16522.39,10408.49 cw(c16527.39,10408.49) 16524.08,10412.24 ; 16522.39,10408.49 cw(c16527.39,10408.49) 16524.08,10412.24 ; 16522.39,10408.49 cw(c16527.39,10408.49) 16524.08,10412.24 ; 16522.39,10408.49 cw(c16527.39,10408.49) 16524.08,10412.24 ; 16522.39,10408.49 cw(c16527.39,10408.49) 16524.08,10412.24 ; 16522.39,10408.49 cw(c16527.39,10408.49) 16524.08,10412.24 ; 16522.39,10408.49 cw(c16527.39,10408.49) 16524.08,10412.24 ; 16522.39,10408.49 cw(c16527.39,10408.49) 16524.08,10412.24 ; 16522.39,10408.49 v1(16522.39,10298.31) 16522.88,10297.82 16522.88,10199.7
  Bottom 6+gnd w5: U2.44@16522.64,10236.22 v1@16522.64,10298.06 ; R65.2@17947.32,11096.87 17948.15,11096.69 17960.69,11094.03 v1(17982.46,11094.03)
D10: IC1.66 R66.2 U1.45 U2.45 | length 3395.8
  Top Layer 1 w5: U1.45@16554.13,9775.59 16554.38,9818.09 v1(16554.38,9837.68) ; v1(16663.51,10410.52) 16664.42,10411.44 IC1.66@16664.42,10466.15
  Unused w5: v1(16554.38,9837.68) 16555.86,9839.15 cw(c16559.38,9835.6) 16557.07,9840.04 16578.77,9851.31 cw(c16585.87,9837.68) 16582.62,9852.7 16763.13,9891.8 cw(c16774.85,9837.68) 16766.04,9892.35 16827.44,9902.22 cw(c16837.84,9837.68) 16847.68,9902.31 16929.65,9889.72 ccw(c16935.11,9924.67) 16936.94,9889.34 16987.02,9891.88 ccw(c16985.24,9927.2) 16995.73,9893.42 17106.18,9927.69 ccw(c17098.03,9953.96) 17113.78,9931.41 17670.18,10319.51 cw(c17710.04,10262.58) 17690.73,10329.34 17899.51,10389.75 ccw(c17859.4,10529.09) 17932.36,10403.78 18056.84,10476.43 ccw(c17983.57,10601.98) 18109.64,10529.6 18141.23,10584.61 ccw(c18110.55,10602.23) 18144.94,10610.53 18135.19,10650.89 ccw(c18100.81,10642.59) 18135.05,10651.46 18124.84,10690.67 ccw(c18090.6,10681.8) 18124,10693.46 18053.8,10898.45 cw(c18141.73,10928.53) 18052.29,10903.28 17997.25,11098.21 ccw(c17982.46,11094.03) 17996.91,11099.28 v1(17982.46,11139.03)
  Layer 3 w5: v1(16554.38,9837.68) 16554.38,10149.87 ; v1(16663.51,10410.52) 16636.6,10403.33 ccw(c16643.15,10378.82) 16630.48,10400.81 16605.64,10386.49 ccw(c16618.3,10364.5) 16605.11,10386.18 16555.55,10356.02 ; 16552.92,10153.31 cw(c16549.38,10149.78) 16554.38,10149.87 ; 16552.92,10153.31 cw(c16549.38,10149.78) 16554.38,10149.87 ; 16552.92,10153.31 cw(c16549.38,10149.78) 16554.38,10149.87 ; 16552.92,10153.31 cw(c16549.38,10149.78) 16554.38,10149.87 ; 16552.92,10153.31 cw(c16549.38,10149.78) 16554.38,10149.87 ; 16552.92,10153.31 cw(c16549.38,10149.78) 16554.38,10149.87 ; 16552.92,10153.31 cw(c16549.38,10149.78) 16554.38,10149.87 ; 16552.92,10153.31 cw(c16549.38,10149.78) 16554.38,10149.87 ; 16552.92,10153.31 cw(c16549.38,10149.78) 16554.38,10149.87 ; 16552.92,10153.31 cw(c16549.38,10149.78) 16554.38,10149.87 ; 16552.92,10153.31 cw(c16549.38,10149.78) 16554.38,10149.87 ; 16552.92,10153.31 cw(c16549.38,10149.78) 16554.38,10149.87 ; 16552.92,10153.31 cw(c16549.38,10149.78) 16554.38,10149.87 ; 16552.92,10153.31 cw(c16549.38,10149.78) 16554.38,10149.87 ; 16552.92,10153.31 cw(c16549.38,10149.78) 16554.38,10149.87 ; 16552.92,10153.31 cw(c16549.38,10149.78) 16554.38,10149.87 ; 16552.92,10153.31 16542.99,10163.28 cw(c16553.89,10174.13) 16542.29,10184.22 16551.92,10195.28 ccw(c16548.15,10198.56) 16553.15,10198.47 v1(16553.15,10298.82) 16553.15,10351.75 ; 16553.15,10351.75 cw(c16558.15,10351.75) 16555.55,10356.02 ; 16553.15,10351.75 cw(c16558.15,10351.75) 16555.55,10356.02 ; 16553.15,10351.75 cw(c16558.15,10351.75) 16555.55,10356.02 ; 16553.15,10351.75 cw(c16558.15,10351.75) 16555.55,10356.02 ; 16553.15,10351.75 cw(c16558.15,10351.75) 16555.55,10356.02 ; 16553.15,10351.75 cw(c16558.15,10351.75) 16555.55,10356.02 ; 16553.15,10351.75 cw(c16558.15,10351.75) 16555.55,10356.02 ; 16553.15,10351.75 cw(c16558.15,10351.75) 16555.55,10356.02 ; 16553.15,10351.75 cw(c16558.15,10351.75) 16555.55,10356.02 ; 16553.15,10351.75 cw(c16558.15,10351.75) 16555.55,10356.02 ; 16553.15,10351.75 cw(c16558.15,10351.75) 16555.55,10356.02 ; 16553.15,10351.75 cw(c16558.15,10351.75) 16555.55,10356.02 ; 16553.15,10351.75 cw(c16558.15,10351.75) 16555.55,10356.02 ; 16553.15,10351.75 cw(c16558.15,10351.75) 16555.55,10356.02 ; 16553.15,10351.75 cw(c16558.15,10351.75) 16555.55,10356.02 ; 16553.15,10351.75 cw(c16558.15,10351.75) 16555.55,10356.02
  Bottom 6+gnd w5: v1(16553.15,10298.82) 16553.15,10237.2 U2.45@16554.13,10236.22 ; R66.2@17947.32,11138.18 17948.43,11138.18 17981.61,11138.18 v1(17982.46,11139.03)